# EAGLE board receiver (EAGLE 9.6.2)

Size 100 x 80 mm. Coordinates in mm from the lower left corner, seen from the top.
Outline: 0,0 100,0 100,80 0,80 0,0
Copper layers (1*16): Top 0.035mm / dielectric 1.5mm / Bottom 0.035mm
Design rules "default": minimum track width 6mil, minimum drill 0.35mm, track to track 6mil, track to pad 6mil, pad to pad 6mil, via to via 6mil, smd to smd 6mil, copper to edge 40mil, drill to drill 6mil, minimum pad ring 10mil, minimum via ring 8mil, stop-mask expansion 4mil, vias tented up to drill 0mil, thermal gap 10mil

## Footprints (pad centres in the part's own frame; a part is rotated, then mirrored left to right if it is on the bottom)
HLMP6 = drill 0.813 long: A -1.27,0; K 1.27,0
BUZZER-12MM-KIT = drill 0.9 pad 1.88: + 3.25,0; - -3.25,0
NODEMCU_ESP8266 = drill 0.8 long: 3V3@1 -11.43,19.05; 3V3@2 -11.43,-3.81; 3V3@3 11.43,8.89; A0 11.43,-16.51; CLK 11.43,3.81; CMD 11.43,-1.27; D0 -11.43,-16.51; D1 -11.43,-13.97; D2 -11.43,-11.43; D3 -11.43,-8.89; D4 -11.43,-6.35; D5 -11.43,1.27; D6 -11.43,3.81; D7 -11.43,6.35; D8 -11.43,8.89; EN 11.43,11.43; GND@1 -11.43,16.51; GND@2 -11.43,-1.27; GND@3 11.43,6.35; GND@4 11.43,16.51; RST 11.43,13.97; RSV1 11.43,-11.43; RSV2 11.43,-13.97; RX -11.43,11.43; SD1 11.43,-3.81; SD2 11.43,-6.35; SD3 11.43,-8.89; SDO 11.43,1.27; TX -11.43,13.97; VIN 11.43,19.05 | drill 3: P$31 10.16,22.86; P$32 -10.16,22.86; P$33 -10.16,-20.32; P$34 10.16,-20.32 | hole 3: 10.16,22.86; 10.16,-20.32; -10.16,-20.32; -10.16,22.86
0207/12 = drill 0.813 octagon: 1 -6.35,0; 2 6.35,0
JP2 = drill 0.914 long: 1 -2.54,0; 2 0,0; 3 2.54,0
RF-LINK_RX = drill 1.016 pad 1.88: +5V@1 -12.7,-0.127; +5V@2 12.7,0.127; ANT 20.32,-0.127; DATA@1 -17.78,-0.127; DATA@2 -15.24,0.127; GND@2 15.24,-0.127; GND@3 17.78,0.127 | drill 1.016 pad 1.88 square: GND@1 -20.32,0.127
TO92-CBE = drill 0.813 long: B 0,0; C -2.54,0; E 2.54,0

## Placement (x,y rotation side)
D2  HLMP6  [HLMP6]  -38.1,90.17 0 top  (outside the outline)
D3  HLMP6  [HLMP6]  -52.07,90.17 0 top  (outside the outline)
D4  HLMP6  [HLMP6]  -66.04,90.17 0 top  (outside the outline)
D5  HLMP6  [HLMP6]  -22.86,95.25 0 top  (outside the outline)
D6  HLMP6  [HLMP6]  -36.83,95.25 0 top  (outside the outline)
LS1  BUZZER-PTH_KIT  [BUZZER-12MM-KIT]  -78.74,6.35 0 top  (outside the outline)
NODE1  NODEMCU_ESP8266  [NODEMCU_ESP8266]  -27.94,27.94 0 top  (outside the outline)
R1  1K  [0207/12]  -35.56,82.55 0 top  (outside the outline)
R2  1K  [0207/12]  -50.8,82.55 0 top  (outside the outline)
R5  10K  [0207/12]  -20.32,88.9 0 top  (outside the outline)
RELAY  [JP2]  -62.23,76.2 0 top  (outside the outline)
RXB6  RF-LINK_RX  [RF-LINK_RX]  -35.56,77.47 0 top  (outside the outline)
T1  2N2222  [TO92-CBE]  -16.51,82.55 0 top  (outside the outline)

## Library data of the parts
D2-D6 = display-hp; MF: AGILENT TECHNOLOGIES; MPN: HLMP-6500; OC_FARNELL: 1652490; OC_NEWARK: 40K0088
LS1 = SparkFun-Electromechanical; PROD_ID: COMP-08253; SF_SKU: COM-07950
NODE1 = nodemcu_esp8266
R1 R2 R5 = rcl; SPICEPREFIX: R
RELAY = jumper
RXB6 = SparkFun-RF; SF_ID: WRL-10533
T1 = transistor

## Nets
3V3: NODE1.3V3@1 NODE1.3V3@2 NODE1.3V3@3
GND: LS1.- NODE1.GND@1 NODE1.GND@2 NODE1.GND@3 NODE1.GND@4 R2.1 RELAY.3 RXB6.GND@1 T1.E
N$1: R1.2 T1.B
N$2: NODE1.D0 R1.1
N$3: R5.1 RELAY.2 T1.C
N$4: NODE1.D4 RXB6.DATA@1
N$5: LS1.+ NODE1.D1
N$6: D2.K D3.K D4.K D5.K D6.K R2.2
N$10: D6.A NODE1.D8
N$11: D5.A NODE1.D7
N$12: D4.A NODE1.D6
N$13: D3.A NODE1.D5
N$15: D2.A NODE1.D3
VCC: R5.2 RELAY.1 RXB6.+5V@1
VIN: NODE1.VIN

## Tracks (layer width: path | path; a pad name or v marks a point on that pad's centre or on a via)
3V3  (2 unrouted)
GND  (8 unrouted)
N$1  (1 unrouted)
N$2  (1 unrouted)
N$3  (2 unrouted)
N$4  (1 unrouted)
N$5  (1 unrouted)
N$6  (5 unrouted)
N$10  (1 unrouted)
N$11  (1 unrouted)
N$12  (1 unrouted)
N$13  (1 unrouted)
N$15  (1 unrouted)
VCC  (2 unrouted)